# Altium PCB 4Wheel_MotorDrivers_Encoders.PcbDoc
Units mil, origin at the board's own origin, x right, y up, seen from the top; angles counter-clockwise.
Board outline 3100 x 1305 mil, 2 copper layers (Top Layer, Bottom Layer); 35 components, 49 nets, 206 pads, 143 vias.
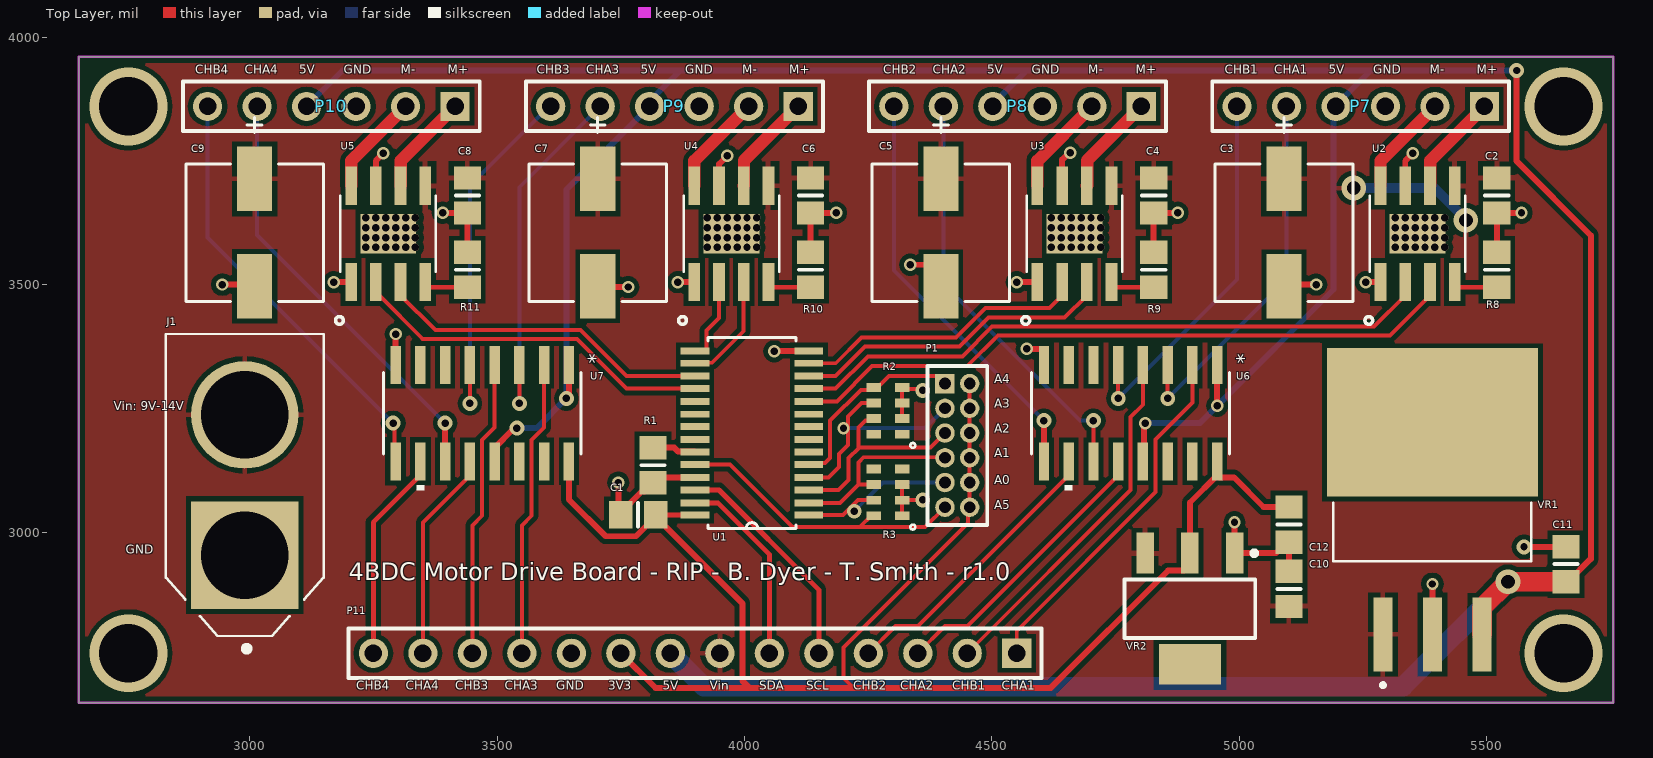
[diagram p0: Top Layer view]
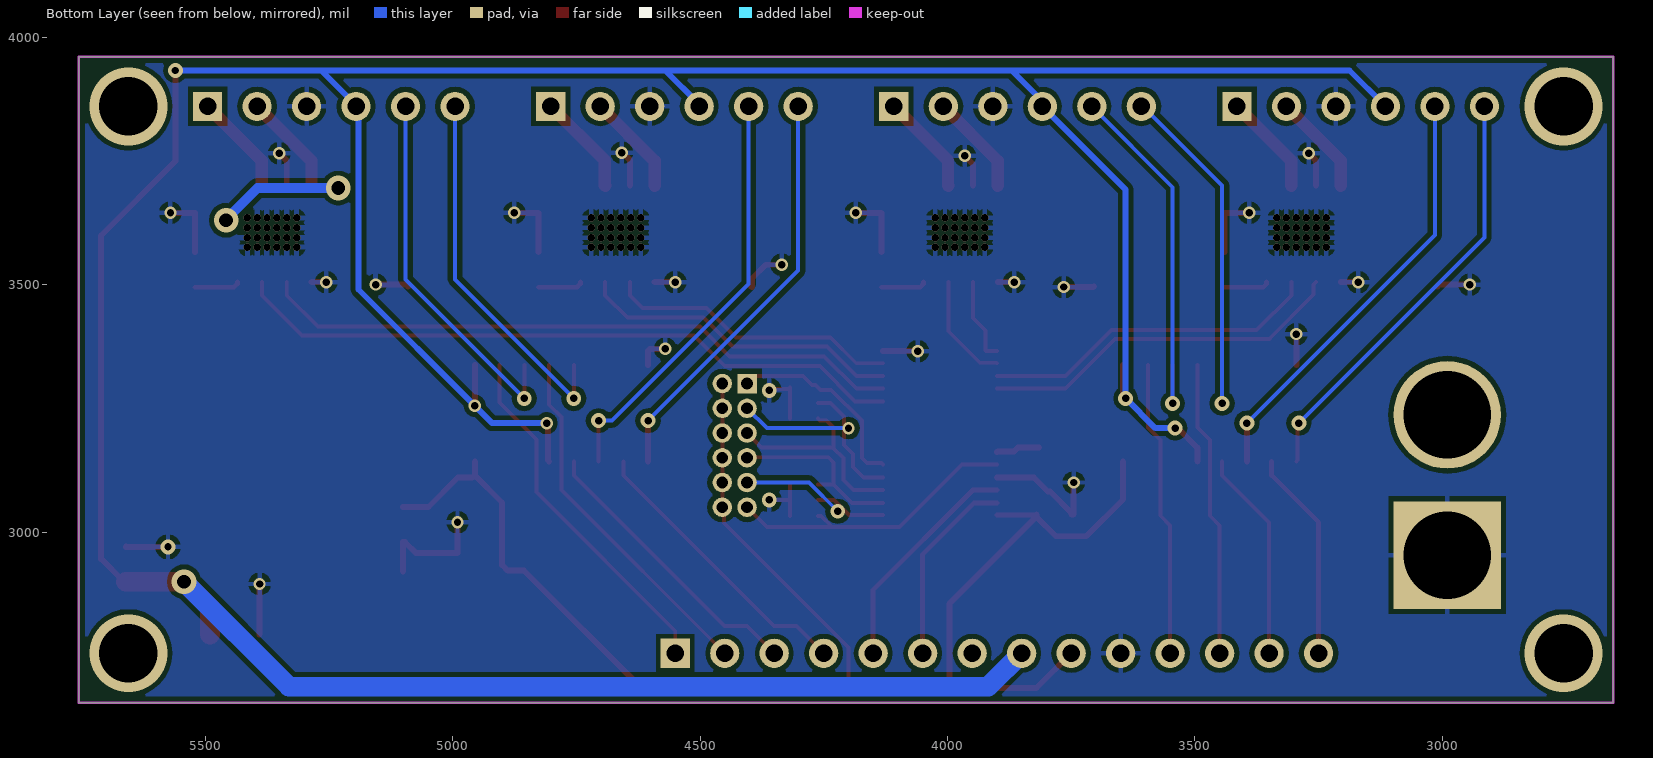
[diagram p1: Bottom Layer view, seen from below]

## Layer stack, top to bottom
Top Solder: solder mask 0.4, Solder Resist, Dk 3.5
Top Layer: signal copper 1.4
Dielectric 1: dielectric 12.6, FR-4, Dk 4.8
Bottom Layer: signal copper 1.4
Bottom Solder: solder mask 0.4, Solder Resist, Dk 3.5

## Board outline
2655,2655 5755,2655 5755,3960 2655,3960

## Design rules (kind name [scope] priority, off if disabled: settings)
Clearance [All] p1: gap=10 ignorepadtopadclearanceinfootprint=FALSE except(0: Arc-Hole Track-Hole SMDPad-Hole THPad-Hole Via-Hole Fill-Hole Poly-Hole Region-Hole Text-Hole)
PlaneConnect [All] p1: planeconnectstyle=Direct reliefexpansion=20 reliefentries=4 reliefconductorwidth=10 reliefairgap=10
PolygonConnect [All] p1: connectstyle=Relief reliefconductorwidth=10 reliefentries=4 polygonreliefangle="90 Angle" airgapwidth=10
RoutingVias [All] p1: holewidth=28 width=50 viastyle="Through Hole" minholewidth=15 minwidth=15 maxholewidth=28 maxwidth=50
SolderMaskExpansion [All] p1: expansion=4 istentingtop=FALSE
Width [All] p1: maxlimit=180 minlimit=6 preferedwidth=10
29 further rules are at their usual default settings.

## Components (designator, comment, footprint, x,y, rotation, side; value= is the part's Value field where it differs from the comment)
C1 "Cap" 6-0805_N 3785,3035 r0 top value=10uF
C2 "0.1uF" 6-0805_N 5520,3680 r90 top
C3 "47uF" PCAP_6.3x7.7-ELE 5090,3605 r270 top value=Value
C4 "0.1uF" 6-0805_N 4826.67,3680 r90 top
C5 "47uF" PCAP_6.3x7.7-ELE 4396.67,3605 r270 top value=Value
C6 "0.1uF" 6-0805_N 4133.33,3680 r90 top
C7 "47uF" PCAP_6.3x7.7-ELE 3703.33,3605 r270 top value=Value
C8 "0.1uF" 6-0805_N 3440,3680 r90 top
C9 "47uF" PCAP_6.3x7.7-ELE 3010,3605 r270 top value=Value
C10 "Cap" 6-0805_N 5100,2885 r270 top value=10uF
C11 "Cap" 6-0805_N 5660,2935 r270 top value=10uF
C12 "Cap" 6-0805_N 5100,3015 r90 top value=10uF
J1 "XT60-M" *AMASS_XT60-M 2990,3095 r90 top
P1 "MHDR2X6" MHDR2X6 4405,3300 r270 top
P7 "Header 6" HDR1X6 5495,3860 r180 top
P8 "Header 6" HDR1X6 4801.67,3860 r180 top
P9 "Header 6" HDR1X6 4108.33,3860 r180 top
P10 "Header 6" HDR1X6 3415,3860 r180 top
P11 "Header 7X2" HDR1X14 4550,2755 r180 top
R1 "Res1" 6-0805_N 3815,3135 r90 top value=10K
R2 "CAY16-103J4LF" CAY16-J4 4290,3245 r180 top
R3 "CAY16-103J4LF" CAY16-J4 4290,3080 r180 top
R8 "Res1" 6-0805_N 5520,3530 r270 top value=33K
R9 "Res1" 6-0805_N 4826.67,3530 r270 top value=33K
R10 "Res1" 6-0805_N 4133.33,3530 r270 top value=33K
R11 "Res1" 6-0805_N 3440,3530 r270 top value=33K
U1 "PCA9685PW/Q900,118" *SOP65P640X110-28N 4015,3200 r180 top
U2 "DRV8871DDAR" *SOIC127P600X170-8N 5360,3602.56 r90 top
U3 "DRV8871DDAR" *SOIC127P600X170-8N 4666.67,3602.56 r90 top
U4 "DRV8871DDAR" *SOIC127P600X170-8N 3973.33,3602.56 r90 top
U5 "DRV8871DDAR" *SOIC127P600X170-8N 3280,3602.56 r90 top
U6 "Part Number: MC14504BDR2G" SOIC-16 4780,3240 r270 top value=Value
U7 "Part Number: MC14504BDR2G" SOIC-16 3470,3240 r270 top value=Value
VR1 "Volt Reg" *TO254P1524X483-4N 5390,3045 r90 top
VR2 "Volt Reg" SOT223_L 4900,2845 r270 top

## Footprints (in the part's own frame and the unit in brackets; to place one, negate y for a bottom-side part, rotate by r counter-clockwise, add the part's x,y. Pads: shape width x height; smd on the part's side, far side on the other; paste and mask are expansions set on the pad)
6-0805_N [mm] "Chip Resistor, Body 2.0x1.2mm, IPC Medium Density"
  rect 1.2x1.4 smd: 1(-0.9,0) 2(0.9,0)
  silkscreen extent 0,-0.6 0,0.6, body extent -1.07,-0.7 1.07,0.7, height 0.7
*AMASS_XT60-M [mm]
  rect 5.516x5.516 hole 4.5: 1(-3.6,0)
  round 5.516 hole 4.5: 2(3.6,0)
  silkscreen extent -8.55,-4.05 7.75,4.05
*SOIC127P600X170-8N [mm]
  rect 1.97x0.6 smd: 1(-2.475,1.905) 2(-2.475,0.635) 3(-2.475,-0.635) 4(-2.475,-1.905) 5(2.475,-1.905) 6(2.475,-0.635) 7(2.475,0.635) 8(2.475,1.905)
  rect 2.02x2.87 smd: 9(0,0)
  silkscreen extent -4.64,-2.45 1.95,2.7
*SOP65P640X110-28N [mil]
  rect 58x14 smd: 1(-115,166) 2(-115,141) 3(-115,115) 4(-115,90) 5(-115,64) 6(-115,38) 7(-115,13) 8(-115,-13) 9(-115,-38) 10(-115,-64) 11(-115,-90) 12(-115,-115) 13(-115,-141) 14(-115,-166) 15(115,-166) 16(115,-141) 17(115,-115) 18(115,-90) 19(115,-64) 20(115,-38) 21(115,-13) 22(115,13) 23(115,38) 24(115,64) 25(115,90) 26(115,115) 27(115,141) 28(115,166)
  silkscreen extent -89,-193 89,193
*TO254P1524X483-4N [mm]
  rect 3.79x0.99 smd: 1(-6.4,2.54) 2(-6.4,0) 3(-6.4,-2.54)
  rect 7.62x10.84 smd: 4(4.48,0)
  silkscreen extent -9.1,-5.08 0.35,5.08
CAY16-J4 [mm]
  rect 0.75x0.45 smd: 1(-0.725,1.2) 2(-0.725,0.4) 3(-0.725,-0.4) 4(-0.725,-1.2) 5(0.725,-1.2) 6(0.725,-0.4) 7(0.725,0.4) 8(0.725,1.2)
  silkscreen extent -1.4,1.65 -1.14,1.9
HDR1X6 [mm] "Connector; Header; 6 Position"
  rect 1.5x1.5 hole 0.9: 1(0,0)
  round 1.5 hole 0.9: 2(2.54,0) 3(5.08,0) 4(7.62,0) 5(10.16,0) 6(12.7,0)
  silkscreen extent -1.27,-1.27 13.97,1.27
HDR1X14 [mm] "Connector; Header; 14 Position"
  rect 1.5x1.5 hole 0.9: 1(0,0)
  round 1.5 hole 0.9: 2(2.54,0) 3(5.08,0) 4(7.62,0) 5(10.16,0) 6(12.7,0) 7(15.24,0) 8(17.78,0) 9(20.32,0) 10(22.86,0) 11(25.4,0) 12(27.94,0) 13(30.48,0) 14(33.02,0)
  silkscreen extent -1.27,-1.27 34.29,1.27
MHDR2X6 [mm] "Connector; Header; 6x2 Position"
  rect 1x1 hole 0.6: 1(0,0)
  round 1 hole 0.6: 2(0,1.27) 3(1.27,0) 4(1.27,1.27) 5(2.54,0) 6(2.54,1.27) 7(3.81,0) 8(3.81,1.27) 9(5.08,0) 10(5.08,1.27) 11(6.35,0) 12(6.35,1.27)
  silkscreen extent -0.9,-0.9 7.25,2.17
PCAP_6.3x7.7-ELE [mil]
  rect 130x71 smd paste+0 mask+0: 1(-108.5,0) 2(108.5,0)
  silkscreen extent -232,-139 139,139, body extent 0,0 10,10, height 10
SOIC-16 [mil]
  rect 77x21 smd: 1(-97.5,175) 2(-97.5,125) 3(-97.5,75) 4(-97.5,25) 5(-97.5,-25) 6(-97.5,-75) 7(-97.5,-125) 8(-97.5,-175) 9(97.5,-175) 10(97.5,-125) 11(97.5,-75) 12(97.5,-25) 13(97.5,25) 14(97.5,75) 15(97.5,125) 16(97.5,175)
  silkscreen extent -82,-200 156,200, body extent 0,0 10,10, height 10
SOT223_L [mm] "SOT223, 4-Leads, Body 6.5x3.5mm, Pitch 2.3mm, Lead Span 7mm, IPC High Density"
  rect 2.1x0.9 smd: 1(-2.85,2.3) 2(-2.85,0) 3(-2.85,-2.3)
  rect 2.1x3.2 smd: 4(2.85,0)
  silkscreen extent -2.97,-3.35 1.5,3.43, body extent -1.85,-3.35 1.85,3.35, height 1.7

## Part data
C1: "Capacitor", Supplier Part Number 1=399-4925-1-ND, LatestRevisionDate=17-Jul-2002, LatestRevisionNote="Re-released for DXP Platform.", PackageDescription="Radial Cap, Thru-Hole; 2 Leads; 0.3 in Pin Spacing", PackageReference=RAD-0.3, Published=8-Jun-2000, Publisher="Altium Limited", Supplier 1=Digi-Key
C2 C4 C6 C8: library part Cap, "Capacitor", LatestRevisionDate=17-Jul-2002, LatestRevisionNote="Re-released for DXP Platform.", PackageDescription="Radial Cap, Thru-Hole; 2 Leads; 0.3 in Pin Spacing", PackageReference=RAD-0.3, Published=8-Jun-2000, Publisher="Altium Limited"
C3: library part UWT1H470MCL1GS, "No Description Available", Supplier Part Number 1=493-2225-1-ND, Built_By=EMA_UL_Team, Copyright="Copyright (C) 2018 Accelerated Designs. All rights reserved", Manufacturer_Part_Number=UWT1H470MCL1GS, RefDes=RefDes, Supplier 1=Digi-Key, Type=DEV, Vendor=Nichicon
C5 C7 C9: library part UWT1H470MCL1GS, "No Description Available", Built_By=EMA_UL_Team, Copyright="Copyright (C) 2018 Accelerated Designs. All rights reserved", Manufacturer_Part_Number=UWT1H470MCL1GS, RefDes=RefDes, Type=DEV, Vendor=Nichicon
C10 C11 C12: "Capacitor", LatestRevisionDate=17-Jul-2002, LatestRevisionNote="Re-released for DXP Platform.", PackageDescription="Radial Cap, Thru-Hole; 2 Leads; 0.3 in Pin Spacing", PackageReference=RAD-0.3, Published=8-Jun-2000, Publisher="Altium Limited"
J1: "Plug; DC supply; XT60; male; PIN: 2; for cable; soldered; 30A; 500V", Package="Package Analog Devices", Availability=Unavailable, MF=AMASS, MP=XT60-M, Price=None, SnapEDA_Link=https://www.snapeda.com/parts/XT60-M/AMASS/view-part/2883912/?ref=snap
P1: "Header, 6-Pin, Dual row", Supplier Part Number 1=609-3713-ND, LatestRevisionDate=17-Jul-2002, LatestRevisionNote="Re-released for DXP Platform.", Publisher="Altium Limited", Supplier 1=Digi-Key
P7: "Header, 6-Pin", Supplier Part Number 1=609-3263-ND, LatestRevisionDate=17-Jul-2002, LatestRevisionNote="Re-released for DXP Platform.", Publisher="Altium Limited", Supplier 1=Digi-Key
P8 P9 P10: "Header, 6-Pin", LatestRevisionDate=17-Jul-2002, LatestRevisionNote="Re-released for DXP Platform.", Publisher="Altium Limited"
P11: "Header, 7-Pin, Dual row", LatestRevisionDate=17-Jul-2002, LatestRevisionNote="Re-released for DXP Platform.", Publisher="Altium Limited"
R1 R9 R10 R11: "Resistor", LatestRevisionDate=17-Jul-2002, LatestRevisionNote="Re-released for DXP Platform.", PackageDescription="Axial Device, Thru-Hole; 2 Leads; 0.3 in Pin Spacing", PackageReference=AXIAL-0.3, Published=8-Jun-2000, Publisher="Altium Limited"
R2: "10k Ohm Â±5% 62.5mW Power Per Element Isolated Resistor Network/Array Â±200ppm/Â°C 1206 _3216 Metric_, Convex, Long Side Terminals", Package="1206 Bourns", Supplier Part Number 1=CAY16-103J4LFCT-ND, Availability=Unavailable, MF=Bourns, MP=CAY16-103J4LF, Price=None, SnapEDA_Link=https://www.snapeda.com/parts/CAY16-103J4LF/Bourns%20-%20J.W.%20Miller/view-part/47136/?ref=snap, Supplier 1=Digi-Key
R3: "10k Ohm Â±5% 62.5mW Power Per Element Isolated Resistor Network/Array Â±200ppm/Â°C 1206 _3216 Metric_, Convex, Long Side Terminals", Package="1206 Bourns", Availability=Unavailable, MF=Bourns, MP=CAY16-103J4LF, Price=None, SnapEDA_Link=https://www.snapeda.com/parts/CAY16-103J4LF/Bourns%20-%20J.W.%20Miller/view-part/47136/?ref=snap
R8: "Resistor", Supplier Part Number 1=541-33.0KCCT-ND, LatestRevisionDate=17-Jul-2002, LatestRevisionNote="Re-released for DXP Platform.", PackageDescription="Axial Device, Thru-Hole; 2 Leads; 0.3 in Pin Spacing", PackageReference=AXIAL-0.3, Published=8-Jun-2000, Publisher="Altium Limited", Supplier 1=Digi-Key
U1: "LED Driver IC 16 Output Linear PWM Dimming 25mA 28-TSSOP", Package="TSSOP-28 NXP Semiconductors", Supplier Part Number 1=568-5931-1-ND, Digi-Key_Part_Number=568-5931-1-ND, Digi-Key_Purchase_URL=https://www.digikey.com/product-detail/en/nxp-usa-inc/PCA9685PW-Q900,118/568-5931-1-ND/2531218?utm_source=snapeda&utm_medium=aggregator&utm_campaign=symbol, MF="NXP USA", MP=PCA9685PW/Q900,118, SnapEDA_Link=https://www.snapeda.com/parts/PCA9685PW/Q900%2C118/NXP%20USA%20Inc./view-part/380795/?ref=snap, Supplier 1=Digi-Key
U2 U3 U4 U5: "Unipolar Motor Driver NMOS PWM 8-SO PowerPad", Package="SO-8 Texas Instruments", Supplier Part Number 1=296-43024-1-ND, Digi-Key_Part_Number=296-43024-1-ND, Digi-Key_Purchase_URL=https://www.digikey.com/product-detail/en/texas-instruments/DRV8871DDAR/296-43024-1-ND/5722182?utm_source=snapeda&utm_medium=aggregator&utm_campaign=symbol, MF="Texas Instruments", MP=DRV8871DDAR, SnapEDA_Link=https://www.snapeda.com/parts/DRV8871DDAR/Texas%20Instruments/view-part/492651/?ref=snap, Supplier 1=Digi-Key
U6 U7: library part MC14504BDR2G, "No Description Available", Supplier Part Number 1=MC14504BDGOS-ND, Copyright="Copyright (C) 2016 Accelerated Designs. All rights reserved", Manufacturer_Part_Number=MC14504BDR2G, RefDes=RefDes, Supplier 1=Digi-Key, Type=DEV, Vendor="ON Semiconductor"
VR1: "Voltage Regulator", Supplier Part Number 1=576-1122-ND, LatestRevisionDate=29-May-2009, LatestRevisionNote="IPC-7351 Footprint Added.", PackageDescription="3-Pin Transistor Outline Package 2.54 mm Pitch, 15.1 mm Lead Span", PackageReference=D2PAK, Published=24-Mar-1999, Publisher="Altium Limited", Supplier 1=Digi-Key
VR2: "Voltage Regulator", Supplier Part Number 1=LM1117MP-3.3/NOPBCT-ND, LatestRevisionDate=29-May-2009, LatestRevisionNote="IPC-7351 Footprint Added.", PackageDescription="3-Pin Transistor Outline Package 2.54 mm Pitch, 15.1 mm Lead Span", PackageReference=D2PAK, Published=24-Mar-1999, Publisher="Altium Limited", Supplier 1=Digi-Key

## Via types
v1: diameter 15, hole 15, Top Layer to Bottom Layer, tented both sides, 96 vias
v2: diameter 25, hole 15, Top Layer to Bottom Layer, tented both sides, 25 vias
v3: diameter 30, hole 15, Top Layer to Bottom Layer, tented both sides, 15 vias
v4: diameter 157.48, hole 118.11, Top Layer to Bottom Layer, tented both sides, 4 vias
v5: diameter 50, hole 28, Top Layer to Bottom Layer, tented both sides, 3 vias

## Nets (pads, with @x,y where several pads share a name; then routed paths per layer and width w, separated by ;. In a path a pad name is that pad's centre, name@x,y a point inside that pad or via, vN(x,y) a via of type N, cw(c..) or ccw(c..) an arc to the next point about the centre after c; other vN are vias at no path point)
3V3: C1.2 C12.2 P1.2 P1.4 P1.6 P1.8 P1.10 P1.12 P11.9 U1.28 U6.16 U7.16 VR2.2 | length 3222
  Top Layer w8: 4220,2685 4200,2705 4200,2766.56 4451.76,3018.31 4451.76,3046.76 P1.12 P1.10 P1.8 P1.6 P1.4 P1.2
  Top Layer w10: C1.2 3821.43,3034 U1.28
  Top Layer w12: U7.16 3645,3065.76 3719.32,2991.44 3780.81,2991.44 C1.2@3820.43,3031.06 ; P11.9 3820,2685 4010,2685 ; C1.2 C1.2@3820.43,3031.06 ; U6.16 U6.16@4955,3114.5 ; C12.2 5048.75,3050.43 4989.19,3110 4959.5,3110 U6.16@4955,3114.5 ; C1.2@3820.43,3031.06 3995.53,2855.97 3995.53,2699.47 4010,2685 ; 4010,2685 4220,2685 4618.93,2685 4855.79,2921.87 4888.28,2921.87 4900,2933.58 VR2.2 4900,3059.5 U6.16@4955,3114.5
3V3CHA1: P11.1 U6.2 | length 729.5
  Top Layer w8: P11.1 4550,2800 4830.5,3080.5 4830.5,3186.8 4838.7,3195 4905,3261.3 U6.2
3V3CHA2: P11.3 U6.12 | length 581.9
  Top Layer w8: P11.3 4405,2810 4450.5,2810 4755,3114.5 U6.12
3V3CHA3: P11.11 U7.2 | length 601.1
  Top Layer w8: P11.11 3550,3013.41 3569.5,3032.91 3569.5,3185.8 3595,3211.3 U7.2
3V3CHA4: P11.13 U7.12 | length 426.9
  Top Layer w8: P11.13 3350,3019.5 3445,3114.5 U7.12
3V3CHB1: P11.2 U6.4 | length 729.5
  Top Layer w8: P11.2 4779.5,3084.5 4779.5,3185.8 4780,3186.3 4780,3232.15 4805,3257.15 U6.4
3V3CHB2: P11.4 U6.10 | length 581.9
  Top Layer w8: P11.4 4305,2810 4350.5,2810 4655,3114.5 U6.10
3V3CHB3: P11.12 U7.4 | length 601.1
  Top Layer w8: P11.12 3450,3013.41 3469.5,3032.91 3469.5,3185.8 3495,3211.3 U7.4
3V3CHB4: P11.14 U7.10 | length 426.9
  Top Layer w10: P11.14 3250,3019.5 3345,3114.5 U7.10
5V: C11.2 P7.4 P8.4 P9.4 P10.4 P11.8 U6.1 U6.13 U7.1 U7.13 VR1.3 | length 7917
  Top Layer w12: U7.13 3495,3170.5 3532.01,3207.51 3537.51,3207.51 v3(3540,3210) ; v3(3640,3270) 3640,3273.52 3645,3278.52 U7.1 ; U6.13 4807.51,3145.01 4807.51,3217.51 v2(4810,3220) ; v2(4955,3255) U6.1 ; v3(5560,3932.5) 5560,3749.24 5710,3599.24 5710,2945.63 5663.94,2899.57 C11.2
  Top Layer w40: VR1.3 5490,2847.13 v5(5542.44,2899.57) C11.2
  Bottom Layer w12: P10.4 3187.5,3932.5 3870,3932.5 ; v3(3540,3210) 3580,3210 v3(3640,3270) 3640,3691.67 P9.4 3808.33,3870.83 3870,3932.5 ; P8.4 4501.67,3864.17 4570,3932.5 ; v2(4810,3220) 4920,3220 v2(4955,3255) 5190,3490 5190,3855 P7.4 5195,3862.5 5265,3932.5 ; v3(5560,3932.5) 5265,3932.5 ; 3870,3932.5 4570,3932.5 ; 4570,3932.5 5265,3932.5
  Bottom Layer w40: P11.8 3917.5,2687.5 5330.37,2687.5 v5(5542.44,2899.57)
5VCHA1: P7.5 U6.3 | length 756.9
  Top Layer w8: v3(4855,3270) U6.3
  Bottom Layer w8: v3(4855,3270) 5095,3510 P7.5
5VCHA2: P8.5 U6.11 | length 859.2
  Top Layer w8: U6.11 v3(4705,3225)
  Bottom Layer w8: P8.5 4401.67,3500.86 4677.52,3225 v3(4705,3225)
5VCHA3: P9.5 U7.3 | length 745.2
  Top Layer w8: v3(3545,3260) U7.3
  Bottom Layer w8: v3(3545,3260) 3545,3696.67 P9.5
5VCHA4: P10.5 U7.11 | length 874.9
  Top Layer w12: U7.11 v3(3395,3220)
  Bottom Layer w8: P10.5 3015,3600 v3(3395,3220)
5VCHB1: P7.6 U6.5 | length 756.9
  Top Layer w8: v3(4755,3270) U6.5
  Bottom Layer w8: v3(4755,3270) 4995,3510 P7.6
5VCHB2: P8.6 U6.9 | length 843.1
  Top Layer w12: U6.9 v3(4605,3225)
  Bottom Layer w8: P8.6 4301.67,3528.33 v3(4605,3225)
5VCHB3: P9.6 U7.5 | length 747.1
  Top Layer w8: v3(3445,3260) U7.5
  Bottom Layer w8: v3(3445,3260) 3445,3700 3605,3860 P9.6
5VCHB4: P10.6 U7.9 | length 874.9
  Top Layer w8: v3(3290,3220) 3292.5,3217.5 3292.5,3145 U7.9
  Bottom Layer w8: P10.6 2915,3595 v3(3290,3220)
12V: C2.2 C3.1 C4.2 C5.1 C6.2 C7.1 C8.2 C9.1 C10.2 J1.2 P11.7 U2.5 U3.5 U4.5 U5.5 VR1.1 VR2.3 | length 254.2
  Bottom Layer w20: v5(5231,3695) 5393.89,3695 5457.44,3631.45 v5(5457.44,3630)
A0: P1.9 R3.7 U1.1 | length 351.3
  Top Layer w8: U1.1 4199,3034 4229.25,3064.25 R3.7
  Bottom Layer w8: v3(4221.7,3042) 4279.7,3100 P1.9
A1: P1.7 R3.6 U1.2 | length 371.4
  Top Layer w8: U1.2 4193.25,3059 4230,3095.75 ; R3.6 4230,3095.75 ; P1.7 4403.9,3151.1 4240.48,3151.1 4230,3140.62 4230,3095.75
A2: P1.5 R2.7 U1.3 | length 428.9
  Top Layer w8: U1.3 4190,3085 4210,3105 4210,3149.18 4230.82,3170 ; R2.7 4257.6,3225.39 4244.26,3225.39 4230,3211.13 4230,3170.82 4230.82,3170 ; P1.5 4376.1,3171.1 4232.2,3171.1 4231.09,3170 4230.82,3170
A3: P1.3 R2.6 U1.4 | length 464.9
  Top Layer w8: U1.4 4170,3110 4191,3131 4191,3157.87 4209.06,3175.93 4209.06,3233.46 4236.35,3260.75 R2.6
  Bottom Layer w8: v2(4200,3210) 4365,3210 P1.3
A4: P1.1 R2.5 U1.5 | length 399.8
  Top Layer w8: U1.5 4133,3139 4162.8,3139 4173,3149.2 4173,3224.88 4235.51,3287.39 4256.6,3287.39 4266.31,3297.1 4273.87,3297.1 4291.87,3315.1 4389.9,3315.1 P1.1
A5: P1.11 R3.8 U1.24 | length 609
  Top Layer w8: U1.24 3970.79,3136 4096.79,3010 4296.46,3010 ; 4234.8,3012 4255.55,3032.76 R3.8 ; 4296.57,3009.9 4339.11,3009.9 4339.21,3010 4365,3010 P1.11
GND: C1.1 C2.1 C3.2 C4.1 C5.2 C6.1 C7.2 C8.1 C9.2 C10.1 C11.1 C12.1 J1.1 P7.3 P8.3 P9.3 P10.3 P11.10 R1.1 R2.2 R2.3 R2.4 R3.1 R3.2 R3.3 R8.1 R9.1 R10.1 R11.1 U1.14 U1.25 U2.1 U2.7 U2.9 U3.1 U3.7 U3.9 U4.1 U4.7 U4.9 U5.1 U5.7 U5.9 U6.8 U7.8 VR1.2 VR2.1 | length 2319
  Top Layer w8: R3.1 R3.2 ; R3.3 R3.2 ; R2.2 R2.3 R2.4 4321.4,3289.39 4356.72,3289.39 v3(4360,3286.1) ; v3(4360,3065) 4359.63,3064.63 4318.92,3064.63 R3.2
  Top Layer w12: v2(2945,3500) 3006.5,3500 C9.2 ; v2(3170,3505) 3204.88,3505 U5.1 ; U5.7 3255,3750 v2(3270,3765) ; U7.8 v2(3295,3400) ; v2(3390,3645) 3439.57,3645 C8.1 R11.1 ; C7.2 3704.83,3495 v2(3765,3495) ; v2(3745,3100) 3745,3035 C1.1 3749.57,3038.94 3792.57,3081.94 3797.38,3081.94 R1.1 3825.43,3110 U1.25 ; v2(3865,3505) 3865.12,3505.12 U4.1 ; U4.7 3948.33,3743.33 v2(3965,3760) ; v2(4060,3365) 4060,3366 U1.14 ; R10.1 C6.1 4133.77,3645 v2(4185,3645) ; v2(4335,3540) 4367.17,3540 4395,3512.17 4395,3495 4396.5,3496.5 C5.2 ; v2(4550,3505) 4591.55,3505 U3.1 ; v2(4570,3370) 4600.5,3370 4605,3365.5 U6.8 ; U3.7 4641.67,3752.42 4655.95,3766.7 v2(4657.86,3766.7) ; R9.1 C4.1 4827.1,3645 v2(4875,3645) ; v2(4990,3020) 4990.28,3019.72 4990.28,2957.48 VR2.1 5073.7,2957.2 5096.06,2979.57 C12.1 C10.1 ; C3.2 5093.5,3500 v2(5155,3500) ; v2(5255,3505) 5284.88,3505 U2.1 ; U2.7 5335,3750 v2(5350,3765) ; VR1.2 v2(5390,2895) ; R8.1 C2.1 5520.43,3645 v2(5570,3645) ; v3(5575,2970) 5659.57,2970 C11.1
  other v1: 3235,3575 3255,3575 3275,3575 3295,3575 3315,3575 3335,3575 3925,3575 3945,3575 3965,3575 3985,3575 4005,3575 4025,3575 4620,3575 4640,3575 4660,3575 4680,3575 4700,3575 4720,3575 5315,3575 5335,3575 5355,3575 5375,3575 5395,3575 5415,3575 3235,3595 3255,3595 3275,3595 3295,3595 3315,3595 3335,3595 3925,3595 3945,3595 3965,3595 3985,3595 4005,3595 4025,3595 4620,3595 4640,3595 4660,3595 4680,3595 4700,3595 4720,3595 5315,3595 5335,3595 5355,3595 5375,3595 5395,3595 5415,3595 3235,3615 3255,3615 3275,3615 3295,3615 3315,3615 3335,3615 3925,3615 3945,3615 3965,3615 3985,3615 4005,3615 4025,3615 4620,3615 4640,3615 4660,3615 4680,3615 4700,3615 4720,3615 5315,3615 5335,3615 5355,3615 5375,3615 5395,3615 5415,3615 3235,3635 3255,3635 3275,3635 3295,3635 3315,3635 3335,3635 3925,3635 3945,3635 3965,3635 3985,3635 4005,3635 4025,3635 4620,3635 4640,3635 4660,3635 4680,3635 4700,3635 4720,3635 5315,3635 5335,3635 5355,3635 5375,3635 5395,3635 5415,3635
M1+: P7.1 U2.6 | length 205.6
  Top Layer w25: U2.6 5385.69,3700.69 5385.69,3750.69 P7.1
M1-: P7.2 U2.8 | length 205.6
  Top Layer w25: U2.8 5285,3750 P7.2
M2+: P8.1 U3.6 | length 205.6
  Top Layer w25: U3.6 4692.36,3700.69 4692.36,3750.69 P8.1
M2-: P8.2 U3.8 | length 205.6
  Top Layer w25: U3.8 4591.67,3750 P8.2
M3+: P9.1 U4.6 | length 205.6
  Top Layer w25: U4.6 3999.02,3700.69 3999.02,3750.69 P9.1
M3-: P9.2 U4.8 | length 205.6
  Top Layer w25: U4.8 3898.33,3750 P9.2
M4+: P10.1 U5.6 | length 205.6
  Top Layer w25: U5.6 3305.69,3700.69 3305.69,3750.69 P10.1
M4-: P10.2 U5.8 | length 205.6
  Top Layer w25: U5.8 3205,3750 P10.2
NetR1_2: R1.2 U1.23 | length 88.5
  Top Layer w12: R1.2 3857.94,3170.43 3865.37,3163 3899,3163 U1.23
NetR8_2: R8.2 U2.4 | length 91.6
  Top Layer w10: U2.4 5435,3501.38 5441.81,3494.57 R8.2
NetR9_2: R9.2 U3.4 | length 91.6
  Top Layer w10: U3.4 4741.67,3501.38 4748.48,3494.57 R9.2
NetR10_2: R10.2 U4.4 | length 91.6
  Top Layer w10: U4.4 4048.33,3501.38 4055.14,3494.57 R10.2
NetR11_2: R11.2 U5.4 | length 91.6
  Top Layer w10: U5.4 3355,3501.38 3361.81,3494.57 R11.2
PWM+1: U1.10 U2.3 | length 1370.7
  Top Layer w8: U1.10 4186.67,3264 4257.67,3335 4450,3335 4512,3397 5303.85,3397 5385,3478.15 U2.3
PWM+2: U1.12 U3.3 | length 656.2
  Top Layer w8: U1.12 4183.77,3315 4243.77,3375 4434.54,3375 4492.54,3433 4646.52,3433 4691.67,3478.15 U3.3
PWM+3: U1.16 U4.3 | length 224.5
  Top Layer w8: U1.16 3901,3342 3934.63,3342 3998.33,3405.71 U4.3
PWM+4: U1.17 U5.3 | length 689.5
  Top Layer w8: U5.3 3305,3478.15 3375.15,3408 3668.75,3408 3761.75,3315 U1.17
PWM-1: U1.11 U2.2 | length 1309.9
  Top Layer w8: U1.11 4184.22,3290 4249.22,3355 4440,3355 4500,3415 5271.85,3415 5335,3478.15 U2.2
PWM-2: U1.13 U3.2 | length 595.4
  Top Layer w8: U1.13 4184.31,3341 4236.31,3393 4427.09,3393 4486.43,3452.34 4615.86,3452.34 4641.67,3478.15 U3.2
PWM-3: U1.15 U4.2 | length 172
  Top Layer w8: U1.15 3922,3366 3923,3367 3923,3407 3948.33,3432.34 U4.2
PWM-4: U1.18 U5.2 | length 746
  Top Layer w8: U5.2 3260,3500.12 3260,3479.73 3349.73,3390 3661.3,3390 3761.3,3290 U1.18
SCL: P11.5 U1.26 | length 461.8
  Top Layer w10: U1.26 3948.28,3085 4150,2883.28 P11.5
SDA: P11.6 U1.27 | length 393.1
  Top Layer w10: U1.27 3946,3059 4050,2955 P11.6
pads on no net: R2.1 R2.8 R3.4 R3.5 U1.6 U1.7 U1.8 U1.9 U1.19 U1.20 U1.21 U1.22 U6.6 U6.7 U6.14 U6.15 U7.6 U7.7 U7.14 U7.15 VR1.4 VR2.4
copper on no net:
  other v4: 2755,2755 5655,2755 2755,3860 5655,3860

## Polygon pours and split planes (outlines as drawn)
12V on Top Layer "12V_L01_P001" (solid, pour order 1): 2655,3960 2655,2655 5755,2655 5755,3960
GND on Bottom Layer "GND_L02_P000" (solid, pour order 0): 2655,3960 2655,2655 5755,2655 5755,3960

## Keep-outs
Keep-Out Layer:
  lines w5: 2655,2655 2780,2655 5755,2655 5755,3960 2765,3960 2655,3960 2655,2655

## Silkscreen, mask and mechanical layers (free items; w line width, h text height)
Top Overlay:
  text "CHB4" at 2890,3920 h30
  text "CHA4" at 2990,3920 h30
  text "5V" at 3100,3920 h30
  text "GND" at 3190,3920 h30
  text "M-" at 3305,3920 h30
  text "M+" at 3400,3920 h30
  text "CHB3" at 3580,3920 h30
  text "CHA3" at 3680,3920 h30
  text "5V" at 3790,3920 h30
  text "GND" at 3880,3920 h30
  text "M-" at 3995,3920 h30
  text "M+" at 4090,3920 h30
  text "CHB2" at 4280,3920 h30
  text "CHA2" at 4380,3920 h30
  text "5V" at 4490,3920 h30
  text "GND" at 4580,3920 h30
  text "M-" at 4695,3920 h30
  text "M+" at 4790,3920 h30
  text "CHB1" at 4970,3920 h30
  text "CHA1" at 5070,3920 h30
  text "5V" at 5180,3920 h30
  text "GND" at 5270,3920 h30
  text "M-" at 5385,3920 h30
  text "M+" at 5480,3920 h30
  text "A4" at 4505,3295 h30
  text "A3" at 4505,3245 h30
  text "Vin: 9V-14V" at 2725,3240 h30
  text "A2" at 4505,3195 h30
  text "A1" at 4505,3145 h30
  text "A0" at 4505,3090 h30
  text "A5" at 4505,3040 h30
  text "GND" at 2750,2950 h30
  text "4BDC Motor Drive Board - RIP - B. Dyer - T. Smith - r1.0" at 3200,2890 h60
  text "CHB4" at 3215,2675 h30
  text "CHA4" at 3315,2675 h30
  text "CHB3" at 3415,2675 h30
  text "CHA3" at 3515,2675 h30
  text "GND" at 3620,2675 h30
  text "3V3" at 3725,2675 h30
  text "5V" at 3835,2675 h30
  text "Vin" at 3930,2675 h30
  text "SDA" at 4030,2675 h30
  text "SCL" at 4125,2675 h30
  text "CHB2" at 4220,2675 h30
  text "CHA2" at 4315,2675 h30
  text "CHB1" at 4420,2675 h30
  text "CHA1" at 4520,2675 h30

## Text inside footprints (layer, text, board x,y; h text height)
C3: Mechanical 7 "0.268in/6.807mm" at 4711,3698.75 h25 r270; Mechanical 7 "0.102in/2.591mm" at 4811,3793.25 h25 r270; Mechanical 7 "0.268in/6.807mm" at 5077.5,4046.5 h25 r270; Mechanical 7 "0.291in/7.391mm" at 5344,3698.75 h25 r270; Mechanical 7 "0.031in/0.787mm" at 5077.5,3311.5 h25 r270; Mechanical 7 "Alternate 2 Padstyle: OX90Y60D30P" at 4450.5,4017.5 h50 r270; Mechanical 7 "Alternate 1 Padstyle: OX60Y90D30P" at 4550.5,4017.5 h50 r270; Mechanical 7 "Default Padstyle: RX130Y71D0T" at 4650.5,3967.5 h50 r270
C5: Mechanical 7 "0.268in/6.807mm" at 4017.67,3698.75 h25 r270; Mechanical 7 "0.102in/2.591mm" at 4117.67,3793.25 h25 r270; Mechanical 7 "0.268in/6.807mm" at 4384.17,4046.5 h25 r270; Mechanical 7 "0.291in/7.391mm" at 4650.67,3698.75 h25 r270; Mechanical 7 "0.031in/0.787mm" at 4384.17,3311.5 h25 r270; Mechanical 7 "Alternate 2 Padstyle: OX90Y60D30P" at 3757.17,4017.5 h50 r270; Mechanical 7 "Alternate 1 Padstyle: OX60Y90D30P" at 3857.17,4017.5 h50 r270; Mechanical 7 "Default Padstyle: RX130Y71D0T" at 3957.17,3967.5 h50 r270
C7: Mechanical 7 "0.268in/6.807mm" at 3324.33,3698.75 h25 r270; Mechanical 7 "0.102in/2.591mm" at 3424.33,3793.25 h25 r270; Mechanical 7 "0.268in/6.807mm" at 3690.83,4046.5 h25 r270; Mechanical 7 "0.291in/7.391mm" at 3957.33,3698.75 h25 r270; Mechanical 7 "0.031in/0.787mm" at 3690.83,3311.5 h25 r270; Mechanical 7 "Alternate 2 Padstyle: OX90Y60D30P" at 3063.83,4017.5 h50 r270; Mechanical 7 "Alternate 1 Padstyle: OX60Y90D30P" at 3163.83,4017.5 h50 r270; Mechanical 7 "Default Padstyle: RX130Y71D0T" at 3263.83,3967.5 h50 r270
C9: Mechanical 7 "0.268in/6.807mm" at 2631,3698.75 h25 r270; Mechanical 7 "0.102in/2.591mm" at 2731,3793.25 h25 r270; Mechanical 7 "0.268in/6.807mm" at 2997.5,4046.5 h25 r270; Mechanical 7 "0.291in/7.391mm" at 3264,3698.75 h25 r270; Mechanical 7 "0.031in/0.787mm" at 2997.5,3311.5 h25 r270; Mechanical 7 "Alternate 2 Padstyle: OX90Y60D30P" at 2370.5,4017.5 h50 r270; Mechanical 7 "Alternate 1 Padstyle: OX60Y90D30P" at 2470.5,4017.5 h50 r270; Mechanical 7 "Default Padstyle: RX130Y71D0T" at 2570.5,3967.5 h50 r270
U6: Top Overlay "*" at 4971,3360 h50 r270; Mechanical 7 "0.049in/1.245mm" at 4465,3431.25 h25 r270; Mechanical 7 "0.05in/1.27mm" at 4917.5,3620 h25 r270; Mechanical 7 "0.39in/9.906mm" at 4767.5,3043 h25 r270; Mechanical 7 "0.244in/6.198mm" at 5145,3333.75 h25 r270; Mechanical 7 "0.154in/3.912mm" at 5070,3333.75 h25 r270; Mechanical 7 "Alt 2 Padstyle: OX90Y60D30P" at 4085,3577.5 h50 r270; Mechanical 7 "Alt 1 Padstyle: OX60Y90D30P" at 4145,3577.5 h50 r270; Mechanical 7 "Pin One Padstyle: RX77Y21D0T" at 4325,3590 h50 r270; Mechanical 7 "Default Padstyle: RX77Y21D0T" at 4385,3590 h50 r270; Mechanical 13 "*" at 4922,3314.5 h50 r270
U7: Top Overlay "*" at 3661,3360 h50 r270; Mechanical 7 "0.049in/1.245mm" at 3155,3431.25 h25 r270; Mechanical 7 "0.05in/1.27mm" at 3607.5,3620 h25 r270; Mechanical 7 "0.39in/9.906mm" at 3457.5,3043 h25 r270; Mechanical 7 "0.244in/6.198mm" at 3835,3333.75 h25 r270; Mechanical 7 "0.154in/3.912mm" at 3760,3333.75 h25 r270; Mechanical 7 "Alt 2 Padstyle: OX90Y60D30P" at 2775,3577.5 h50 r270; Mechanical 7 "Alt 1 Padstyle: OX60Y90D30P" at 2835,3577.5 h50 r270; Mechanical 7 "Pin One Padstyle: RX77Y21D0T" at 3015,3590 h50 r270; Mechanical 7 "Default Padstyle: RX77Y21D0T" at 3075,3590 h50 r270; Mechanical 13 "*" at 3612,3314.5 h50 r270